# Altium PCB ATMEGA16单片机模块.PCBDOC
Units mm, origin at the board's own origin, x right, y up, seen from the top; angles counter-clockwise.
Board outline 152.4 x 101.6 mm, 2 copper layers (Top Layer, Bottom Layer); 9 components, 39 nets, 100 pads, 0 vias.
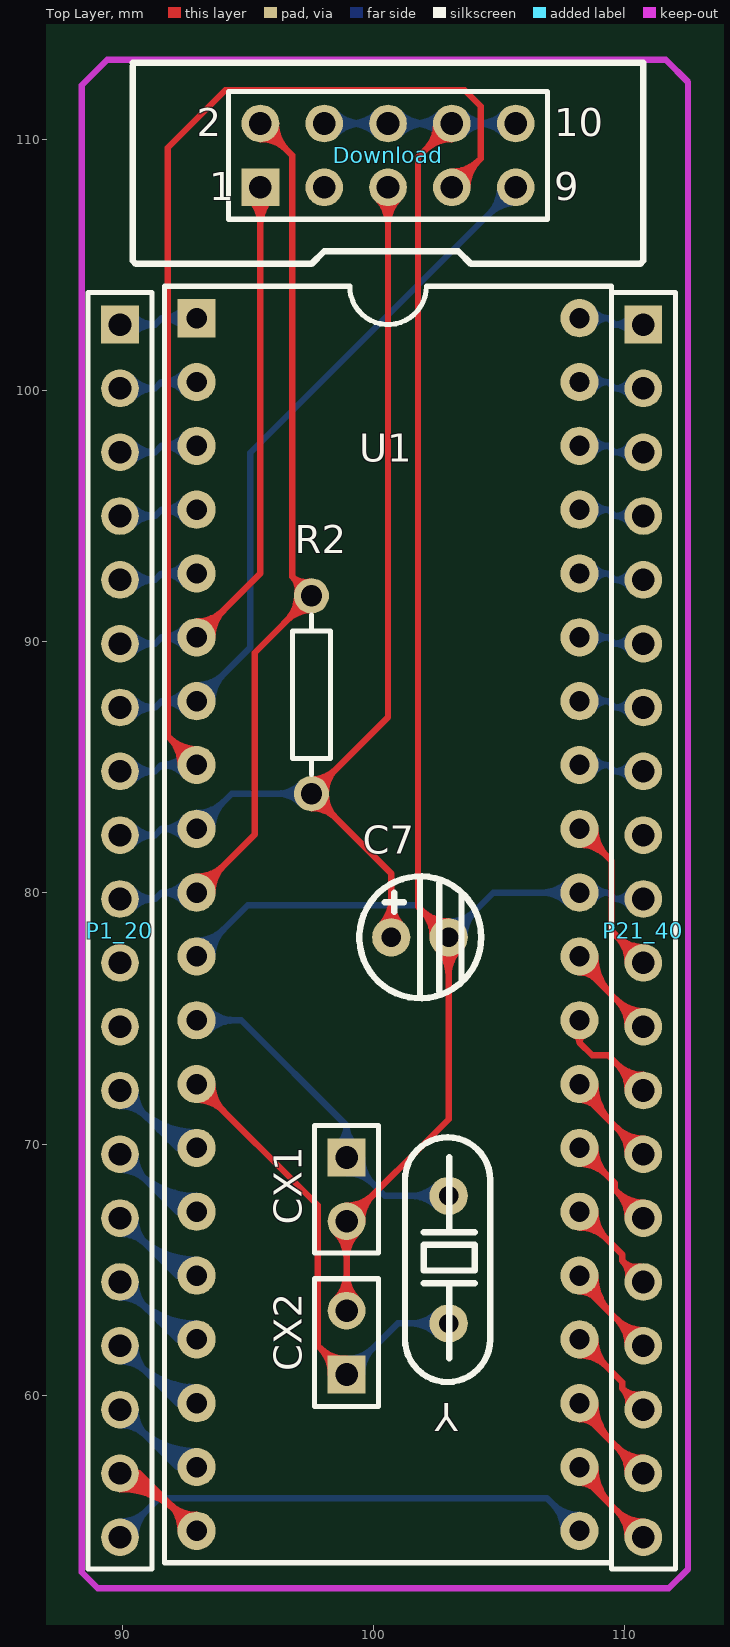
[diagram p0: Top Layer view]
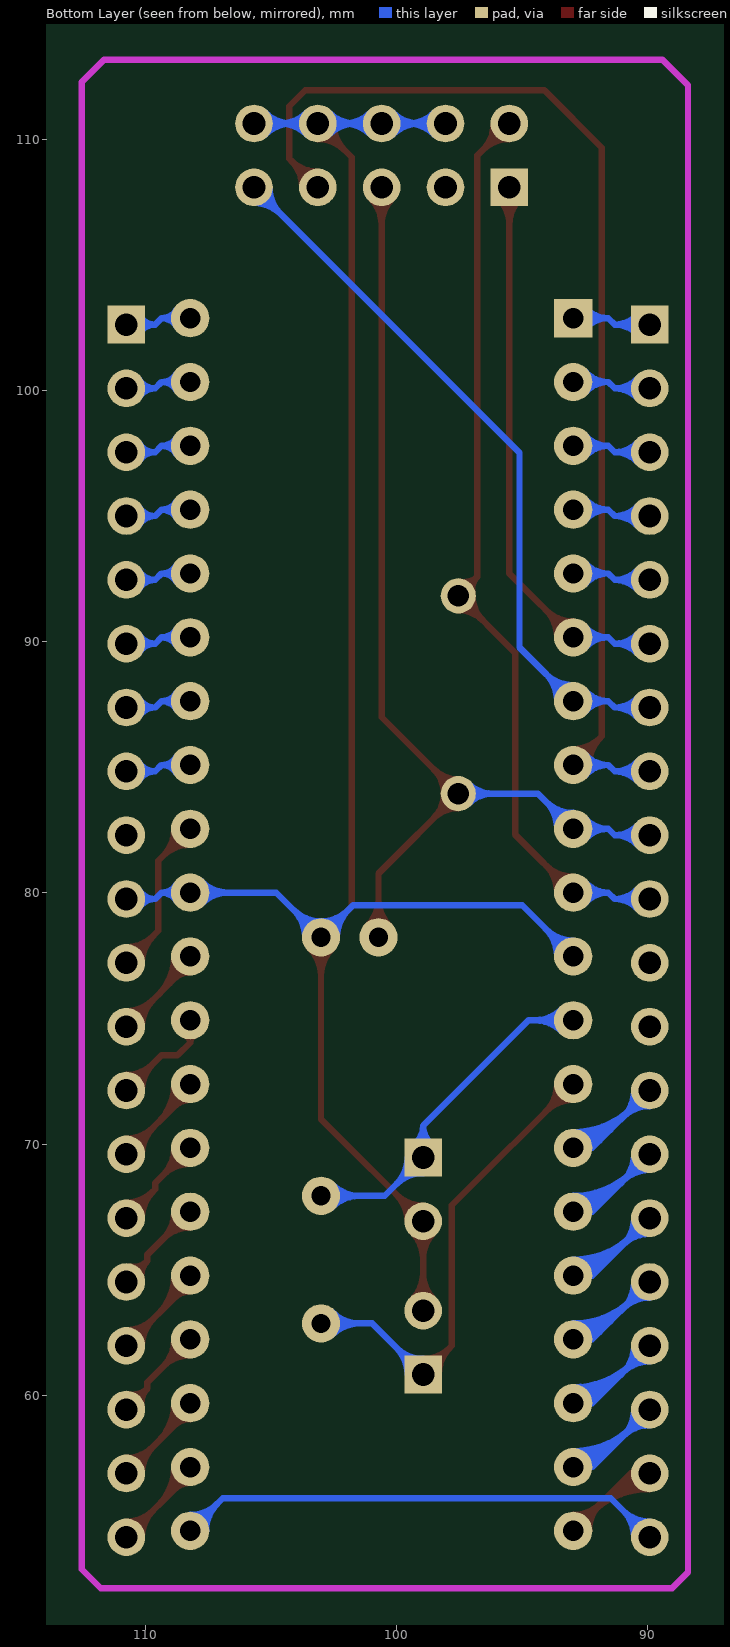
[diagram p1: Bottom Layer view, seen from below]

## Layer stack, top to bottom
Top Layer: signal copper 0.0356
Dielectric: dielectric 0.32, FR-4, Dk 4.8
Bottom Layer: signal copper 0.0356

## Board outline
25.4,25.4 177.8,25.4 177.8,127 25.4,127

## Design rules (kind name [scope] priority, off if disabled: settings)
Clearance [All] p1: gap=0.254
ComponentClearance [All] p1: gap=0.254 collisioncheckmode=3 verticalgap=0.254
PolygonConnect [All] p1: connectstyle=Relief reliefconductorwidth=0.254 reliefentries=4 polygonreliefangle="90 Angle"
RoutingVias [All] p1: holewidth=0.711 width=1.27 viastyle="Through Hole" minholewidth=0.711 minwidth=1.27 maxholewidth=0.711 maxwidth=1.27
SolderMaskExpansion [All] p1: expansion=0.102
TestPointUsage [All] p1: valid=0 allowmultiple=FALSE
Testpoint [All] p1: side=15 testpointundercomponent=TRUE minsize=1.016 maxsize=2.54 preferedsize=1.524 minholesize=0 maxholesize=1.016 preferedholesize=0.813 testpointgrid=0.025 style=1023 order=0123456789
Width [All] p1: maxlimit=0.254 minlimit=0.254 preferedwidth=0.254
17 further rules are at their usual default settings.

## Components (designator, comment, footprint, x,y, rotation, side; value= is the part's Value field where it differs from the comment)
C7 "10uf" C-DJ-4 103.124,75.692 r0 top
CX1 "30p" HDR1X2 98.933,69.469 r270 top
CX2 "30p" HDR1X2 98.933,60.833 r90 top
Download "Download" HDR-2x5 100.584,108.204 r0 top
P1_20 "PZ_20" HDR1X20 89.916,102.616 r270 top
P21_40 "PZ_20" HDR1X20 110.744,102.616 r270 top
R2 "10k" RSE 97.536,87.884 r90 top
U1 "ATmega16-16PI" 底座DIP-40/引脚15.24mm 100.584,78.74 r270 top
Y "Y" JZ_ZC 102.997,62.865 r270 top

## Footprints (in the part's own frame and the unit in brackets; to place one, negate y for a bottom-side part, rotate by r counter-clockwise, add the part's x,y. Pads: shape width x height; smd on the part's side, far side on the other; paste and mask are expansions set on the pad)
C-DJ-4 [mil] "电容4mm"
  round 60 hole 30: 1(-95,100) 2(-5,100)
  silkscreen extent -145,5 46,195
HDR1X2 [mm] "Connector; Header; 2 Position"
  rect 1.5x1.5 hole 0.9: 1(0,0)
  round 1.5 hole 0.9: 2(2.54,0)
  silkscreen extent -1.27,-1.27 3.81,1.27
HDR1X20 [mm] "Connector; Header; 20 Position"
  rect 1.5x1.5 hole 0.9: 1(0,0)
  round 1.5 hole 0.9: 2(2.54,0) 3(5.08,0) 4(7.62,0) 5(10.16,0) 6(12.7,0) 7(15.24,0) 8(17.78,0) 9(20.32,0) 10(22.86,0) 11(25.4,0) 12(27.94,0) 13(30.48,0) 14(33.02,0) 15(35.56,0) 16(38.1,0) 17(40.64,0) 18(43.18,0) 19(45.72,0) 20(48.26,0)
  silkscreen extent -1.27,-1.27 49.53,1.27
HDR-2x5 [mm] "下载口"
  rect 1.5x1.5 hole 0.9: 1(-5.08,-0.127)
  round 1.5 hole 0.9: 2(-5.08,2.413) 3(-2.54,-0.127) 4(-2.54,2.413) 5(0,-0.127) 6(0,2.413) 7(2.54,-0.127) 8(2.54,2.413) 9(5.08,-0.127) 10(5.08,2.413)
  silkscreen extent -10.16,-3.17 10.16,4.83
JZ_ZC [mil] "晶振"
  round 60 hole 30: 1(-200,0) 2(0,0)
  silkscreen extent -292,-68 92,65
RSE [mm] "直插电阻1/8W"
  round 1.4 hole 0.85: 1(-3.937,0) 2(3.937,0)
  silkscreen extent -3.17,-0.76 3.17,0.76
底座DIP-40/引脚15.24mm [mil] "引脚跨度 ：600 Mil ，主体外形 17.8×50.8mm（700×2000Mil）"
  rect 60x60 hole 32: 1(-950,-300)
  round 60 hole 32: 2(-850,-300) 3(-750,-300) 4(-650,-300) 5(-550,-300) 6(-450,-300) 7(-350,-300) 8(-250,-300) 9(-150,-300) 10(-50,-300) 11(50,-300) 12(150,-300) 13(250,-300) 14(350,-300) 15(450,-300) 16(550,-300) 17(650,-300) 18(750,-300) 19(850,-300) 20(950,-300) 21(950,300) 22(850,300) 23(750,300) 24(650,300) 25(550,300) 26(450,300) 27(350,300) 28(250,300) 29(150,300) 30(50,300) 31(-50,300) 32(-150,300) 33(-250,300) 34(-350,300) 35(-450,300) 36(-550,300) 37(-650,300) 38(-750,300) 39(-850,300) 40(-950,300)
  silkscreen extent -1000,-350 1000,350

## Part data
C7: library part "CAPACITOR POL", "Capacitor"
CX1 CX2: library part CAP, "Capacitor"
Download: library part "Header 5X2", "Header, 5-Pin, Dual row"
P1_20 P21_40: "排针——20"
R2: library part RES2
U1: library part ATmega16-P, "8 位微处理器/40引脚"
Y: library part CRYSTAL, "Crystal"

## Nets (pads, with @x,y where several pads share a name; then routed paths per layer and width w, separated by ;. In a path a pad name is that pad's centre, name@x,y a point inside that pad or via, vN(x,y) a via of type N, cw(c..) or ccw(c..) an arc to the next point about the centre after c; other vN are vias at no path point)
AREF: P21_40.11 U1.32 | length 14
  Top Layer w0.254: U1.32@108.204,81.915 cw(c108.204,80.382) 109.288,81.466 cw(c110.372,82.55) U1.32@108.839,82.55 ; U1.32@108.204,82.169 cw(c108.204,81.249) 108.854,81.9 cw(c109.505,82.55) U1.32@108.585,82.55 ; U1.32 109.474,81.28 109.474,78.486 P21_40.11 ; P21_40.11@110.121,77.216 ccw(c108.617,77.216) 109.68,78.28 ccw(c110.744,79.343) P21_40.11@110.744,77.839 ; P21_40.11@110.375,77.216 ccw(c109.484,77.216) 110.114,77.846 ccw(c110.744,78.476) P21_40.11@110.744,77.585
AVCC: P21_40.12 U1.30 | length 11.2
  Top Layer w0.254: U1.30@108.204,76.835 cw(c108.204,75.915) 108.854,76.566 ; U1.30 108.204,77.216 P21_40.12 ; U1.30@108.585,77.47 ccw(c110.118,77.47) 109.034,76.386 ; U1.30@108.839,77.47 ccw(c110.985,77.47) 109.468,75.952 ; P21_40.12@110.121,74.676 ccw(c108.617,74.676) 109.68,75.74 ccw(c110.744,76.803) P21_40.12@110.744,75.299 ; P21_40.12@110.375,74.676 ccw(c109.484,74.676) 110.114,75.306 ccw(c110.744,75.936) P21_40.12@110.744,75.045
GND: C7.2 CX1.2 CX2.2 Download.4 Download.6 Download.8 Download.10 P21_40.10 U1.11 U1.31 | length 141.2
  Top Layer w0.254: CX2.2@98.492,63.814 ccw(c97.429,64.877) 98.933,64.877 ccw(c100.437,64.877) CX2.2@99.374,63.814 ; CX1.2@98.492,66.488 cw(c97.429,65.425) 98.933,65.425 cw(c100.437,65.425) CX1.2@99.374,66.488 ; CX2.2@98.672,63.634 ccw(c98.042,64.264) 98.933,64.264 ccw(c99.824,64.264) CX2.2@99.194,63.634 ; CX1.2@98.672,66.668 cw(c98.042,66.038) 98.933,66.038 cw(c99.824,66.038) CX1.2@99.194,66.668 ; CX2.2 CX1.2 102.997,70.993 C7.2 101.778,79.451 101.778,109.271 Download.8 ; CX1.2@98.933,67.298 ccw(c98.933,68.189) 99.563,67.559 ccw(c100.193,66.929) CX1.2@99.302,66.929 ; CX1.2@98.933,67.552 ccw(c98.933,69.056) 99.997,67.993 ccw(c101.06,66.929) CX1.2@99.556,66.929 ; C7.2@102.362,78.232 ccw(c100.829,78.232) 101.913,79.316 ccw(c102.997,80.4) C7.2@102.997,78.867 ; Download.8@102.501,110.617 cw(c100.997,110.617) 102.06,109.553 cw(c103.124,108.49) Download.8@103.124,109.994 ; C7.2@102.548,77.783 cw(c101.464,76.699) 102.997,76.699 cw(c104.53,76.699) C7.2@103.446,77.783 ; C7.2@102.616,78.232 ccw(c101.696,78.232) 102.347,78.882 ccw(c102.997,79.533) C7.2@102.997,78.613 ; C7.2@102.728,77.963 cw(c102.077,77.312) 102.997,77.312 cw(c103.917,77.312) C7.2@103.266,77.963 ; Download.8@102.755,110.617 cw(c101.864,110.617) 102.494,109.987 cw(c103.124,109.357) Download.8@103.124,110.248
  Bottom Layer w0.254: U1.11 94.996,79.502 101.727,79.502 C7.2 104.775,80.01 U1.31 109.347,80.01 ; U1.11@92.964,77.851 ccw(c92.964,78.771) 93.614,78.12 ccw(c94.265,77.47) U1.11@93.345,77.47 ; U1.11@92.964,78.105 ccw(c92.964,79.638) 94.048,78.554 ccw(c95.132,77.47) U1.11@93.599,77.47 ; Download.4 Download.6 Download.8 Download.10 ; Download.4@98.305,110.356 cw(c98.935,109.726) 98.935,110.617 cw(c98.935,111.508) Download.4@98.305,110.878 ; Download.4@98.485,110.176 cw(c99.548,109.113) 99.548,110.617 cw(c99.548,112.121) Download.4@98.485,111.058 ; Download.6@100.143,110.176 ccw(c99.08,109.113) 99.08,110.617 ccw(c99.08,112.121) Download.6@100.143,111.058 ; Download.6@100.323,110.356 ccw(c99.693,109.726) 99.693,110.617 ccw(c99.693,111.508) Download.6@100.323,110.878 ; Download.6@100.845,110.356 cw(c101.475,109.726) 101.475,110.617 cw(c101.475,111.508) Download.6@100.845,110.878 ; Download.6@101.025,110.176 cw(c102.088,109.113) 102.088,110.617 cw(c102.088,112.121) Download.6@101.025,111.058 ; C7.2@102.362,78.232 ccw(c100.829,78.232) 101.913,79.316 ccw(c102.997,80.4) 102.997,78.867 ccw(c102.997,80.4) 104.081,79.316 ccw(c105.165,78.232) C7.2@103.632,78.232 ; C7.2@102.616,78.232 ccw(c101.696,78.232) 102.347,78.882 ccw(c102.997,79.533) 102.997,78.613 ccw(c102.997,79.533) 103.647,78.882 ccw(c104.298,78.232) C7.2@103.378,78.232 ; Download.8@102.683,110.176 ccw(c101.62,109.113) 101.62,110.617 ccw(c101.62,112.121) Download.8@102.683,111.058 ; Download.8@102.863,110.356 ccw(c102.233,109.726) 102.233,110.617 ccw(c102.233,111.508) Download.8@102.863,110.878 ; Download.8@103.385,110.356 cw(c104.015,109.726) 104.015,110.617 cw(c104.015,111.508) Download.8@103.385,110.878 ; Download.8@103.565,110.176 cw(c104.628,109.113) 104.628,110.617 cw(c104.628,112.121) Download.8@103.565,111.058 ; Download.10@105.223,110.176 ccw(c104.16,109.113) 104.16,110.617 ccw(c104.16,112.121) Download.10@105.223,111.058 ; Download.10@105.403,110.356 ccw(c104.773,109.726) 104.773,110.617 ccw(c104.773,111.508) Download.10@105.403,110.878 ; U1.31@107.755,79.561 ccw(c106.671,78.477) 106.671,80.01 ccw(c106.671,81.543) U1.31@107.755,80.459 ; U1.31@107.935,79.741 ccw(c107.284,79.09) 107.284,80.01 ccw(c107.284,80.93) U1.31@107.935,80.279 ; U1.31@108.743,79.675 cw(c109.347,79.299) 109.347,80.01 ; U1.31@108.743,80.345 ccw(c109.347,80.721) 109.347,80.01 ; P21_40.10@110.22,79.418 ccw(c109.601,79.019) 109.601,79.756 ; P21_40.10@110.22,80.094 cw(c109.601,80.493) 109.601,79.756 ; P21_40.10 109.601,79.756 ; 109.347,80.01 109.601,79.756
PA0: P21_40.1 U1.40 | length 5.6
  Bottom Layer w0.254: U1.40 109.347,102.87 ; U1.40@108.743,102.535 cw(c109.347,102.159) 109.347,102.87 ; U1.40@108.743,103.205 ccw(c109.347,103.581) 109.347,102.87 ; P21_40.1@110.22,102.278 ccw(c109.601,101.879) 109.601,102.616 ; P21_40.1@110.22,102.954 cw(c109.601,103.353) 109.601,102.616 ; P21_40.1 109.601,102.616 ; 109.347,102.87 109.601,102.616
PA1: P21_40.2 U1.39 | length 5.6
  Bottom Layer w0.254: U1.39 109.347,100.33 ; U1.39@108.743,99.995 cw(c109.347,99.619) 109.347,100.33 ; U1.39@108.743,100.665 ccw(c109.347,101.041) 109.347,100.33 ; P21_40.2@110.22,99.738 ccw(c109.601,99.339) 109.601,100.076 ; P21_40.2@110.22,100.414 cw(c109.601,100.813) 109.601,100.076 ; P21_40.2 109.601,100.076 ; 109.347,100.33 109.601,100.076
PA2: P21_40.3 U1.38 | length 5.6
  Bottom Layer w0.254: U1.38 109.347,97.79 ; U1.38@108.743,97.455 cw(c109.347,97.079) 109.347,97.79 ; U1.38@108.743,98.125 ccw(c109.347,98.501) 109.347,97.79 ; P21_40.3@110.22,97.198 ccw(c109.601,96.799) 109.601,97.536 ; P21_40.3@110.22,97.874 cw(c109.601,98.273) 109.601,97.536 ; P21_40.3 109.601,97.536 ; 109.347,97.79 109.601,97.536
PA3: P21_40.4 U1.37 | length 5.6
  Bottom Layer w0.254: U1.37 109.347,95.25 ; U1.37@108.743,94.915 cw(c109.347,94.539) 109.347,95.25 ; U1.37@108.743,95.585 ccw(c109.347,95.961) 109.347,95.25 ; P21_40.4@110.22,94.658 ccw(c109.601,94.259) 109.601,94.996 ; P21_40.4@110.22,95.334 cw(c109.601,95.733) 109.601,94.996 ; P21_40.4 109.601,94.996 ; 109.347,95.25 109.601,94.996
PA4: P21_40.5 U1.36 | length 5.6
  Bottom Layer w0.254: U1.36 109.347,92.71 ; U1.36@108.743,92.375 cw(c109.347,91.999) 109.347,92.71 ; U1.36@108.743,93.045 ccw(c109.347,93.421) 109.347,92.71 ; P21_40.5@110.22,92.118 ccw(c109.601,91.719) 109.601,92.456 ; P21_40.5@110.22,92.794 cw(c109.601,93.193) 109.601,92.456 ; P21_40.5 109.601,92.456 ; 109.347,92.71 109.601,92.456
PA5: P21_40.6 U1.35 | length 5.6
  Bottom Layer w0.254: U1.35 109.347,90.17 ; U1.35@108.743,89.835 cw(c109.347,89.459) 109.347,90.17 ; U1.35@108.743,90.505 ccw(c109.347,90.881) 109.347,90.17 ; P21_40.6@110.22,89.578 ccw(c109.601,89.179) 109.601,89.916 ; P21_40.6@110.22,90.254 cw(c109.601,90.653) 109.601,89.916 ; P21_40.6 109.601,89.916 ; 109.347,90.17 109.601,89.916
PA6: P21_40.7 U1.34 | length 5.6
  Bottom Layer w0.254: U1.34 109.347,87.63 ; U1.34@108.743,87.295 cw(c109.347,86.919) 109.347,87.63 ; U1.34@108.743,87.965 ccw(c109.347,88.341) 109.347,87.63 ; P21_40.7@110.22,87.038 ccw(c109.601,86.639) 109.601,87.376 ; P21_40.7@110.22,87.714 cw(c109.601,88.113) 109.601,87.376 ; P21_40.7 109.601,87.376 ; 109.347,87.63 109.601,87.376
PA7: P21_40.8 U1.33 | length 5.6
  Bottom Layer w0.254: U1.33 109.347,85.09 ; U1.33@108.743,84.755 cw(c109.347,84.379) 109.347,85.09 ; U1.33@108.743,85.425 ccw(c109.347,85.801) 109.347,85.09 ; P21_40.8@110.22,84.498 ccw(c109.601,84.099) 109.601,84.836 ; P21_40.8@110.22,85.174 cw(c109.601,85.573) 109.601,84.836 ; P21_40.8 109.601,84.836 ; 109.347,85.09 109.601,84.836
PB0: P1_20.1 U1.1 | length 9.8
  Bottom Layer w0.254: P1_20.1 91.313,102.616 ; P1_20.1@90.191,102.369 cw(c90.743,101.873) 90.743,102.616 cw(c90.743,103.359) P1_20.1@90.191,102.863 ; P1_20.1@90.38,102.2 cw(c91.313,101.361) 91.313,102.616 ; P1_20.1@90.38,103.032 ccw(c91.313,103.871) 91.313,102.616 ; U1.1@92.486,102.452 ccw(c91.567,101.651) 91.567,102.87 ; U1.1@92.486,103.288 cw(c91.567,104.089) 91.567,102.87 ; U1.1@92.677,102.619 ccw(c92.126,102.139) 92.126,102.87 ccw(c92.126,103.601) U1.1@92.677,103.121 ; U1.1 91.567,102.87 ; 91.313,102.616 91.567,102.87
PB1: P1_20.2 U1.2 | length 9.8
  Bottom Layer w0.254: P1_20.2 91.313,100.076 ; P1_20.2@90.191,99.829 cw(c90.743,99.333) 90.743,100.076 cw(c90.743,100.819) P1_20.2@90.191,100.323 ; P1_20.2@90.38,99.66 cw(c91.313,98.821) 91.313,100.076 ; P1_20.2@90.38,100.492 ccw(c91.313,101.331) 91.313,100.076 ; U1.2@92.486,99.912 ccw(c91.567,99.111) 91.567,100.33 ; U1.2@92.486,100.748 cw(c91.567,101.549) 91.567,100.33 ; U1.2@92.677,100.079 ccw(c92.126,99.599) 92.126,100.33 ccw(c92.126,101.061) U1.2@92.677,100.581 ; U1.2 91.567,100.33 ; 91.313,100.076 91.567,100.33
PB2: P1_20.3 U1.3 | length 9.8
  Bottom Layer w0.254: P1_20.3 91.313,97.536 ; P1_20.3@90.191,97.289 cw(c90.743,96.793) 90.743,97.536 cw(c90.743,98.279) P1_20.3@90.191,97.783 ; P1_20.3@90.38,97.12 cw(c91.313,96.281) 91.313,97.536 ; P1_20.3@90.38,97.952 ccw(c91.313,98.791) 91.313,97.536 ; U1.3@92.486,97.372 ccw(c91.567,96.571) 91.567,97.79 ; U1.3@92.486,98.208 cw(c91.567,99.009) 91.567,97.79 ; U1.3@92.677,97.539 ccw(c92.126,97.059) 92.126,97.79 ccw(c92.126,98.521) U1.3@92.677,98.041 ; U1.3 91.567,97.79 ; 91.313,97.536 91.567,97.79
PB3: P1_20.4 U1.4 | length 9.8
  Bottom Layer w0.254: P1_20.4 91.313,94.996 ; P1_20.4@90.191,94.749 cw(c90.743,94.253) 90.743,94.996 cw(c90.743,95.739) P1_20.4@90.191,95.243 ; P1_20.4@90.38,94.58 cw(c91.313,93.741) 91.313,94.996 ; P1_20.4@90.38,95.412 ccw(c91.313,96.251) 91.313,94.996 ; U1.4@92.486,94.832 ccw(c91.567,94.031) 91.567,95.25 ; U1.4@92.486,95.668 cw(c91.567,96.469) 91.567,95.25 ; U1.4@92.677,94.999 ccw(c92.126,94.519) 92.126,95.25 ccw(c92.126,95.981) U1.4@92.677,95.501 ; U1.4 91.567,95.25 ; 91.313,94.996 91.567,95.25
PB4: P1_20.5 U1.5 | length 9.8
  Bottom Layer w0.254: P1_20.5 91.313,92.456 ; P1_20.5@90.191,92.209 cw(c90.743,91.713) 90.743,92.456 cw(c90.743,93.199) P1_20.5@90.191,92.703 ; P1_20.5@90.38,92.04 cw(c91.313,91.201) 91.313,92.456 ; P1_20.5@90.38,92.872 ccw(c91.313,93.711) 91.313,92.456 ; U1.5@92.486,92.292 ccw(c91.567,91.491) 91.567,92.71 ; U1.5@92.486,93.128 cw(c91.567,93.929) 91.567,92.71 ; U1.5@92.677,92.459 ccw(c92.126,91.979) 92.126,92.71 ccw(c92.126,93.441) U1.5@92.677,92.961 ; U1.5 91.567,92.71 ; 91.313,92.456 91.567,92.71
PB5: Download.1 P1_20.6 U1.6 | length 36.4
  Top Layer w0.254: U1.6 95.504,92.71 Download.1 ; U1.6@92.964,90.551 ccw(c92.964,91.471) 93.614,90.82 ccw(c94.265,90.17) U1.6@93.345,90.17 ; U1.6@92.964,90.805 ccw(c92.964,92.338) 94.048,91.254 ccw(c95.132,90.17) U1.6@93.599,90.17 ; Download.1@95.063,107.636 cw(c94,106.573) 95.504,106.573 cw(c97.008,106.573) Download.1@95.945,107.636 ; Download.1@95.243,107.816 cw(c94.613,107.186) 95.504,107.186 cw(c96.395,107.186) Download.1@95.765,107.816
  Bottom Layer w0.254: P1_20.6 91.313,89.916 ; P1_20.6@90.191,89.669 cw(c90.743,89.173) 90.743,89.916 cw(c90.743,90.659) P1_20.6@90.191,90.163 ; P1_20.6@90.38,89.5 cw(c91.313,88.661) 91.313,89.916 ; P1_20.6@90.38,90.332 ccw(c91.313,91.171) 91.313,89.916 ; U1.6@92.486,89.752 ccw(c91.567,88.951) 91.567,90.17 ; U1.6@92.486,90.588 cw(c91.567,91.389) 91.567,90.17 ; U1.6@92.677,89.919 ccw(c92.126,89.439) 92.126,90.17 ccw(c92.126,90.901) U1.6@92.677,90.421 ; U1.6 91.567,90.17 ; 91.313,89.916 91.567,90.17
PB6: Download.9 P1_20.7 U1.7 | length 43.2
  Bottom Layer w0.254: P1_20.7 91.313,87.376 ; P1_20.7@90.191,87.129 cw(c90.743,86.633) 90.743,87.376 cw(c90.743,88.119) P1_20.7@90.191,87.623 ; P1_20.7@90.38,86.96 cw(c91.313,86.121) 91.313,87.376 ; P1_20.7@90.38,87.792 ccw(c91.313,88.631) 91.313,87.376 ; U1.7@92.486,87.212 ccw(c91.567,86.411) 91.567,87.63 ; U1.7@92.486,88.048 cw(c91.567,88.849) 91.567,87.63 ; U1.7@92.677,87.379 ccw(c92.126,86.899) 92.126,87.63 ccw(c92.126,88.361) U1.7@92.677,87.881 ; U1.7@92.964,88.011 ccw(c92.964,88.931) 93.614,88.28 ccw(c94.265,87.63) U1.7@93.345,87.63 ; U1.7@92.964,88.265 ccw(c92.964,89.798) 94.048,88.714 ccw(c95.132,87.63) U1.7@93.599,87.63 ; Download.9@105.041,108.077 cw(c103.537,108.077) 104.6,107.013 cw(c105.664,105.95) Download.9@105.664,107.454 ; Download.9@105.295,108.077 cw(c104.404,108.077) 105.034,107.447 cw(c105.664,106.817) Download.9@105.664,107.708 ; Download.9 95.098,97.511 95.098,89.764 U1.7 91.567,87.63 ; 91.313,87.376 91.567,87.63
PB7: Download.7 P1_20.8 U1.8 | length 59.8
  Top Layer w0.254: U1.8@92.329,85.09 ccw(c90.796,85.09) 91.88,86.174 ccw(c92.964,87.258) U1.8@92.964,85.725 ; U1.8@92.583,85.09 ccw(c91.663,85.09) 92.314,85.74 ccw(c92.964,86.391) U1.8@92.964,85.471 ; U1.8 91.821,86.233 91.821,109.652 94.107,111.938 103.632,111.938 104.267,111.303 104.267,109.22 Download.7 ; Download.7@103.124,108.446 ccw(c103.124,109.337) 103.754,108.707 ccw(c104.384,108.077) Download.7@103.493,108.077 ; Download.7@103.124,108.7 ccw(c103.124,110.204) 104.188,109.141 ccw(c105.251,108.077) Download.7@103.747,108.077
  Bottom Layer w0.254: P1_20.8 91.313,84.836 ; P1_20.8@90.191,84.589 cw(c90.743,84.093) 90.743,84.836 cw(c90.743,85.579) P1_20.8@90.191,85.083 ; P1_20.8@90.38,84.42 cw(c91.313,83.581) 91.313,84.836 ; P1_20.8@90.38,85.252 ccw(c91.313,86.091) 91.313,84.836 ; U1.8@92.486,84.672 ccw(c91.567,83.871) 91.567,85.09 ; U1.8@92.486,85.508 cw(c91.567,86.309) 91.567,85.09 ; U1.8@92.677,84.839 ccw(c92.126,84.359) 92.126,85.09 ccw(c92.126,85.821) U1.8@92.677,85.341 ; U1.8 91.567,85.09 ; 91.313,84.836 91.567,85.09
PC0: P21_40.20 U1.22 | length 11.2
  Top Layer w0.254: U1.22@108.204,56.515 cw(c108.204,55.595) 108.854,56.246 ; U1.22 108.204,56.896 P21_40.20 ; U1.22@108.585,57.15 ccw(c110.118,57.15) 109.034,56.066 ; U1.22@108.839,57.15 ccw(c110.985,57.15) 109.468,55.632 ; P21_40.20@110.121,54.356 ccw(c108.617,54.356) 109.68,55.42 ccw(c110.744,56.483) P21_40.20@110.744,54.979 ; P21_40.20@110.375,54.356 ccw(c109.484,54.356) 110.114,54.986 ccw(c110.744,55.616) P21_40.20@110.744,54.725
PC1: P21_40.19 U1.23 | length 11.2
  Top Layer w0.254: U1.23@108.204,59.055 cw(c108.204,58.135) 108.854,58.786 ; U1.23 108.204,59.436 P21_40.19 ; U1.23@108.585,59.69 ccw(c110.118,59.69) 109.034,58.606 ; U1.23@108.839,59.69 ccw(c110.985,59.69) 109.468,58.172 ; P21_40.19@110.121,56.896 ccw(c108.617,56.896) 109.68,57.96 ccw(c110.744,59.023) P21_40.19@110.744,57.519 ; P21_40.19@110.375,56.896 ccw(c109.484,56.896) 110.114,57.526 ccw(c110.744,58.156) P21_40.19@110.744,57.265
PC2: P21_40.18 U1.24 | length 9.3
  Top Layer w0.254: U1.24@108.204,61.595 cw(c108.204,60.062) 109.288,61.146 cw(c110.372,62.23) U1.24@108.839,62.23 ; U1.24@108.204,61.849 cw(c108.204,60.929) 108.854,61.58 cw(c109.505,62.23) U1.24@108.585,62.23 ; U1.24 109.906,60.528 109.906,60.274 ; P21_40.18@110.131,59.549 ccw(c109.329,59.697) 109.906,60.274 ; P21_40.18@110.631,60.049 cw(c110.483,60.851) 109.906,60.274 ; P21_40.18 109.906,60.274
PC3: P21_40.17 U1.25 | length 11.2
  Top Layer w0.254: U1.25@108.204,64.135 cw(c108.204,63.215) 108.854,63.866 ; U1.25 108.204,64.516 P21_40.17 ; U1.25@108.585,64.77 ccw(c110.118,64.77) 109.034,63.686 ; U1.25@108.839,64.77 ccw(c110.985,64.77) 109.468,63.252 ; P21_40.17@110.121,61.976 ccw(c108.617,61.976) 109.68,63.04 ccw(c110.744,64.103) P21_40.17@110.744,62.599 ; P21_40.17@110.375,61.976 ccw(c109.484,61.976) 110.114,62.606 ccw(c110.744,63.236) P21_40.17@110.744,62.345
PC4: P21_40.16 U1.26 | length 9.3
  Top Layer w0.254: U1.26@108.204,66.675 cw(c108.204,65.142) 109.288,66.226 cw(c110.372,67.31) U1.26@108.839,67.31 ; U1.26@108.204,66.929 cw(c108.204,66.009) 108.854,66.66 cw(c109.505,67.31) U1.26@108.585,67.31 ; U1.26 109.906,65.608 109.906,65.354 ; P21_40.16@110.131,64.629 ccw(c109.329,64.777) 109.906,65.354 ; P21_40.16@110.631,65.129 cw(c110.483,65.931) 109.906,65.354 ; P21_40.16 109.906,65.354
PC5: P21_40.15 U1.27 | length 11.5
  Top Layer w0.254: U1.27@108.204,69.215 cw(c108.204,67.682) 109.288,68.766 cw(c110.372,69.85) U1.27@108.839,69.85 ; U1.27@108.204,69.469 cw(c108.204,68.549) 108.854,69.2 cw(c109.505,69.85) U1.27@108.585,69.85 ; U1.27 109.601,68.453 109.601,68.199 P21_40.15 ; P21_40.15@110.121,67.056 ccw(c108.617,67.056) 109.68,68.12 ccw(c110.744,69.183) P21_40.15@110.744,67.679 ; P21_40.15@110.375,67.056 ccw(c109.484,67.056) 110.114,67.686 ccw(c110.744,68.316) P21_40.15@110.744,67.425
PC6: P21_40.14 U1.28 | length 11.2
  Top Layer w0.254: U1.28@108.204,71.755 cw(c108.204,70.835) 108.854,71.486 ; U1.28 108.204,72.136 P21_40.14 ; U1.28@108.585,72.39 ccw(c110.118,72.39) 109.034,71.306 ; U1.28@108.839,72.39 ccw(c110.985,72.39) 109.468,70.872 ; P21_40.14@110.121,69.596 ccw(c108.617,69.596) 109.68,70.66 ccw(c110.744,71.723) P21_40.14@110.744,70.219 ; P21_40.14@110.375,69.596 ccw(c109.484,69.596) 110.114,70.226 ccw(c110.744,70.856) P21_40.14@110.744,69.965
PC7: P21_40.13 U1.29 | length 9.5
  Top Layer w0.254: U1.29 108.204,74.041 ; P21_40.13@110.121,72.136 ccw(c108.617,72.136) 109.68,73.2 ccw(c110.744,74.263) P21_40.13@110.744,72.759 ; P21_40.13@110.375,72.136 ccw(c109.484,72.136) 110.114,72.766 ccw(c110.744,73.396) P21_40.13@110.744,72.505 ; P21_40.13 109.347,73.533 108.712,73.533 108.204,74.041 ; 108.204,74.041 ccw(c107.899,74.041) 107.998,74.329 cw(c107.899,74.041) 108.204,74.041 ; 108.204,74.041 cw(c108.509,74.041) 108.41,74.329 ccw(c108.509,74.041) 108.204,74.041
PD0: P1_20.13 U1.14 | length 15.5
  Bottom Layer w0.254: P1_20.13@89.916,71.513 cw(c89.916,70.009) 90.98,71.072 cw(c92.043,72.136) P1_20.13@90.539,72.136 ; P1_20.13@89.916,71.767 cw(c89.916,70.876) 90.546,71.506 cw(c91.176,72.136) P1_20.13@90.285,72.136 ; P1_20.13 92.202,69.85 U1.14 ; 90.579,71.473 ccw(c92.964,73.858) U1.14@92.964,70.485 ; 91.013,71.039 ccw(c92.964,72.99) U1.14@92.964,70.231 ; 91.446,70.606 ccw(c92.964,72.123) U1.14@92.964,69.977 ; 91.88,70.172 ccw(c92.964,71.256) U1.14@92.964,69.723
PD1: P1_20.14 U1.15 | length 15.5
  Bottom Layer w0.254: P1_20.14@89.916,68.973 cw(c89.916,67.469) 90.98,68.532 cw(c92.043,69.596) P1_20.14@90.539,69.596 ; P1_20.14@89.916,69.227 cw(c89.916,68.336) 90.546,68.966 cw(c91.176,69.596) P1_20.14@90.285,69.596 ; P1_20.14 92.202,67.31 U1.15 ; 90.579,68.933 ccw(c92.964,71.318) U1.15@92.964,67.945 ; 91.013,68.499 ccw(c92.964,70.45) U1.15@92.964,67.691 ; 91.446,68.066 ccw(c92.964,69.583) U1.15@92.964,67.437 ; 91.88,67.632 ccw(c92.964,68.716) U1.15@92.964,67.183
PD2: P1_20.15 U1.16 | length 15.5
  Bottom Layer w0.254: P1_20.15@89.916,66.433 cw(c89.916,64.929) 90.98,65.992 cw(c92.043,67.056) P1_20.15@90.539,67.056 ; P1_20.15@89.916,66.687 cw(c89.916,65.796) 90.546,66.426 cw(c91.176,67.056) P1_20.15@90.285,67.056 ; P1_20.15 92.202,64.77 U1.16 ; 90.579,66.393 ccw(c92.964,68.778) U1.16@92.964,65.405 ; 91.013,65.959 ccw(c92.964,67.91) U1.16@92.964,65.151 ; 91.446,65.526 ccw(c92.964,67.043) U1.16@92.964,64.897 ; 91.88,65.092 ccw(c92.964,66.176) U1.16@92.964,64.643
PD3: P1_20.16 U1.17 | length 15.5
  Bottom Layer w0.254: P1_20.16@89.916,63.893 cw(c89.916,62.389) 90.98,63.452 cw(c92.043,64.516) P1_20.16@90.539,64.516 ; P1_20.16@89.916,64.147 cw(c89.916,63.256) 90.546,63.886 cw(c91.176,64.516) P1_20.16@90.285,64.516 ; P1_20.16 92.202,62.23 U1.17 ; 90.579,63.853 ccw(c92.964,66.238) U1.17@92.964,62.865 ; 91.013,63.419 ccw(c92.964,65.37) U1.17@92.964,62.611 ; 91.446,62.986 ccw(c92.964,64.503) U1.17@92.964,62.357 ; 91.88,62.552 ccw(c92.964,63.636) U1.17@92.964,62.103
PD4: P1_20.17 U1.18 | length 15.5
  Bottom Layer w0.254: P1_20.17@89.916,61.353 cw(c89.916,59.849) 90.98,60.912 cw(c92.043,61.976) P1_20.17@90.539,61.976 ; P1_20.17@89.916,61.607 cw(c89.916,60.716) 90.546,61.346 cw(c91.176,61.976) P1_20.17@90.285,61.976 ; P1_20.17 92.202,59.69 U1.18 ; 90.579,61.313 ccw(c92.964,63.698) U1.18@92.964,60.325 ; 91.013,60.879 ccw(c92.964,62.83) U1.18@92.964,60.071 ; 91.446,60.446 ccw(c92.964,61.963) U1.18@92.964,59.817 ; 91.88,60.012 ccw(c92.964,61.096) U1.18@92.964,59.563
PD5: P1_20.18 U1.19 | length 15.5
  Bottom Layer w0.254: P1_20.18@89.916,58.813 cw(c89.916,57.309) 90.98,58.372 cw(c92.043,59.436) P1_20.18@90.539,59.436 ; P1_20.18@89.916,59.067 cw(c89.916,58.176) 90.546,58.806 cw(c91.176,59.436) P1_20.18@90.285,59.436 ; P1_20.18 92.202,57.15 U1.19 ; 90.579,58.773 ccw(c92.964,61.158) U1.19@92.964,57.785 ; 91.013,58.339 ccw(c92.964,60.29) U1.19@92.964,57.531 ; 91.446,57.906 ccw(c92.964,59.423) U1.19@92.964,57.277 ; 91.88,57.472 ccw(c92.964,58.556) U1.19@92.964,57.023
PD6: P1_20.19 U1.20 | length 15.9
  Top Layer w0.254: P1_20.19@89.916,56.273 cw(c89.916,52.929) 92.28,55.294 ; P1_20.19@89.916,56.527 cw(c89.916,53.797) 91.847,55.727 ; P1_20.19@89.916,56.781 cw(c89.916,54.664) 91.413,56.161 ; P1_20.19 90.678,56.896 ; P1_20.19@89.916,57.035 cw(c89.916,55.531) 90.98,56.594 ; P1_20.19@90.527,56.772 cw(c90.678,56.742) 90.678,56.896 ; P1_20.19@90.527,57.02 ccw(c90.678,57.05) 90.678,56.896 ; U1.20@92.329,54.61 ccw(c90.796,54.61) 91.88,55.694 ccw(c92.964,56.778) U1.20@92.964,55.245 ; U1.20@92.583,54.61 ccw(c91.663,54.61) 92.314,55.26 ccw(c92.964,55.911) U1.20@92.964,54.991 ; U1.20 90.678,56.896
PD7: P1_20.20 U1.21 | length 27.1
  Bottom Layer w0.254: P1_20.20 91.465,55.905 106.909,55.905 U1.21 ; P1_20.20@89.916,54.725 ccw(c89.916,55.616) 90.546,54.986 ccw(c91.176,54.356) P1_20.20@90.285,54.356 ; P1_20.20@89.916,54.979 ccw(c89.916,56.483) 90.98,55.42 ccw(c92.043,54.356) P1_20.20@90.539,54.356 ; U1.21@107.569,54.61 ccw(c106.036,54.61) 107.12,55.694 ccw(c108.204,56.778) U1.21@108.204,55.245 ; U1.21@107.823,54.61 ccw(c106.903,54.61) 107.554,55.26 ccw(c108.204,55.911) U1.21@108.204,54.991
RESET: C7.1 Download.5 P1_20.9 R2.1 U1.9 | length 69
  Top Layer w0.254: R2.1@97.536,83.374 cw(c97.536,81.991) 98.514,82.969 cw(c99.492,83.947) 98.109,83.947 cw(c99.492,83.947) 98.514,84.925 cw(c97.536,85.903) R2.1@97.536,84.52 ; R2.1@97.536,83.628 cw(c97.536,82.858) 98.081,83.402 cw(c98.625,83.947) 97.855,83.947 cw(c98.625,83.947) 98.081,84.492 cw(c97.536,85.036) R2.1@97.536,84.266 ; Download.5@100.143,107.636 cw(c99.08,106.573) 100.584,106.573 cw(c102.088,106.573) Download.5@101.025,107.636 ; C7.1@100.262,78.681 ccw(c99.178,79.765) 100.711,79.765 ccw(c102.244,79.765) C7.1@101.16,78.681 ; Download.5@100.323,107.816 cw(c99.693,107.186) 100.584,107.186 cw(c101.475,107.186) Download.5@100.845,107.816 ; C7.1@100.442,78.501 ccw(c99.791,79.152) 100.711,79.152 ccw(c101.631,79.152) C7.1@100.98,78.501 ; Download.5 100.584,86.995 R2.1 100.711,80.772 C7.1
  Bottom Layer w0.254: P1_20.9 91.313,82.296 ; P1_20.9@90.191,82.049 cw(c90.743,81.553) 90.743,82.296 cw(c90.743,83.039) P1_20.9@90.191,82.543 ; P1_20.9@90.38,81.88 cw(c91.313,81.041) 91.313,82.296 ; P1_20.9@90.38,82.712 ccw(c91.313,83.551) 91.313,82.296 ; U1.9@92.486,82.132 ccw(c91.567,81.331) 91.567,82.55 ; U1.9@92.486,82.968 cw(c91.567,83.769) 91.567,82.55 ; U1.9@92.677,82.299 ccw(c92.126,81.819) 92.126,82.55 ccw(c92.126,83.281) U1.9@92.677,82.801 ; U1.9@92.964,82.931 ccw(c92.964,83.851) 93.614,83.2 ccw(c94.265,82.55) U1.9@93.345,82.55 ; U1.9@92.964,83.185 ccw(c92.964,84.718) 94.048,83.634 ccw(c95.132,82.55) U1.9@93.599,82.55 ; R2.1@97.131,83.542 ccw(c96.153,82.564) 96.153,83.947 ccw(c96.153,85.33) R2.1@97.131,84.352 ; R2.1@97.31,83.721 ccw(c96.766,83.177) 96.766,83.947 ccw(c96.766,84.717) R2.1@97.31,84.173 ; R2.1 94.361,83.947 U1.9 91.567,82.55 ; 91.313,82.296 91.567,82.55
VCC: Download.2 P1_20.10 R2.2 U1.10 | length 55.6
  Top Layer w0.254: U1.10 95.275,82.321 95.275,89.56 R2.2 96.774,92.583 ; U1.10@92.964,80.391 ccw(c92.964,81.311) 93.614,80.66 ccw(c94.265,80.01) U1.10@93.345,80.01 ; U1.10@92.964,80.645 ccw(c92.964,82.178) 94.048,81.094 ccw(c95.132,80.01) U1.10@93.599,80.01 ; Download.2@95.504,109.994 cw(c95.504,108.49) 96.568,109.553 cw(c97.631,110.617) Download.2@96.127,110.617 ; Download.2@95.504,110.248 cw(c95.504,109.357) 96.134,109.987 cw(c96.764,110.617) Download.2@95.873,110.617 ; Download.2 96.774,109.347 96.774,92.583 ; R2.2@96.963,91.821 cw(c95.58,91.821) 96.558,90.843 cw(c97.536,89.865) R2.2@97.536,91.248 ; R2.2@96.974,91.93 ccw(c96.26,92.069) 96.774,92.583 ; R2.2@97.217,91.821 cw(c96.447,91.821) 96.991,91.276 cw(c97.536,90.732) R2.2@97.536,91.502 ; R2.2@97.427,92.383 cw(c97.288,93.097) 96.774,92.583
  Bottom Layer w0.254: P1_20.10 91.313,79.756 ; P1_20.10@90.191,79.509 cw(c90.743,79.013) 90.743,79.756 cw(c90.743,80.499) P1_20.10@90.191,80.003 ; P1_20.10@90.38,79.34 cw(c91.313,78.501) 91.313,79.756 ; P1_20.10@90.38,80.172 ccw(c91.313,81.011) 91.313,79.756 ; U1.10@92.486,79.592 ccw(c91.567,78.791) 91.567,80.01 ; U1.10@92.486,80.428 cw(c91.567,81.229) 91.567,80.01 ; U1.10@92.677,79.759 ccw(c92.126,79.279) 92.126,80.01 ccw(c92.126,80.741) U1.10@92.677,80.261 ; U1.10 91.567,80.01 ; 91.313,79.756 91.567,80.01
XTAL1: CX2.1 U1.13 Y.2 | length 34.2
  Top Layer w0.254: U1.13@92.964,71.755 cw(c92.964,70.222) 94.048,71.306 cw(c95.132,72.39) U1.13@93.599,72.39 ; U1.13@92.964,72.009 cw(c92.964,71.089) 93.614,71.74 cw(c94.265,72.39) U1.13@93.345,72.39 ; U1.13 97.79,67.564 97.79,61.976 CX2.1 ; CX2.1@98.31,60.833 ccw(c96.806,60.833) 97.869,61.897 ccw(c98.933,62.96) CX2.1@98.933,61.456 ; CX2.1@98.564,60.833 ccw(c97.673,60.833) 98.303,61.463 ccw(c98.933,62.093) CX2.1@98.933,61.202
  Bottom Layer w0.254: CX2.1 100.965,62.865 Y.2 ; CX2.1@98.933,61.202 ccw(c98.933,62.093) 99.563,61.463 ccw(c100.193,60.833) CX2.1@99.302,60.833 ; CX2.1@98.933,61.456 ccw(c98.933,62.96) 99.997,61.897 ccw(c101.06,60.833) CX2.1@99.556,60.833 ; Y.2@102.548,62.416 ccw(c101.464,61.332) 101.464,62.865 ccw(c101.464,64.398) Y.2@102.548,63.314 ; Y.2@102.728,62.596 ccw(c102.077,61.945) 102.077,62.865 ccw(c102.077,63.785) Y.2@102.728,63.134
XTAL2: CX1.1 U1.12 Y.1 | length 28
  Bottom Layer w0.254: U1.12 94.742,74.93 98.933,70.739 ; U1.12@93.233,74.661 cw(c93.884,74.01) 93.884,74.93 cw(c93.884,75.85) U1.12@93.233,75.199 ; U1.12@93.413,74.481 cw(c94.497,73.397) 94.497,74.93 cw(c94.497,76.463) U1.12@93.413,75.379 ; CX1.1@98.552,69.962 ccw(c97.95,70.739) 98.933,70.739 ; CX1.1@98.707,69.761 ccw(c98.351,70.221) 98.933,70.221 ccw(c99.515,70.221) CX1.1@99.159,69.761 ; CX1.1@98.933,68.846 cw(c98.933,67.342) 99.997,68.405 cw(c101.06,69.469) CX1.1@99.556,69.469 ; CX1.1@98.933,69.1 cw(c98.933,68.209) 99.563,68.839 cw(c100.193,69.469) CX1.1@99.302,69.469 ; CX1.1@99.314,69.962 cw(c99.916,70.739) 98.933,70.739 ; Y.1@102.548,67.496 ccw(c101.464,66.412) 101.464,67.945 ccw(c101.464,69.478) Y.1@102.548,68.394 ; Y.1@102.728,67.676 ccw(c102.077,67.025) 102.077,67.945 ccw(c102.077,68.865) Y.1@102.728,68.214 ; Y.1 100.457,67.945 CX1.1 98.933,70.739
pads on no net: Download.3 P1_20.11 P1_20.12 P21_40.9

## Keep-outs
Keep-Out Layer:
  lines w0.254: 88.392,52.959 89.027,52.324 111.76,52.324 112.522,53.086 112.522,112.268 111.633,113.157 89.408,113.157 88.392,112.141 88.392,52.959

## Silkscreen, mask and mechanical layers (free items; w line width, h text height)
Mechanical 1:
  lines w0.254: 88.392,52.959 89.027,52.324 111.76,52.324 112.522,53.086 112.522,112.268 111.633,113.157 89.408,113.157 88.392,112.141 88.392,52.959

## Text inside footprints (layer, text, board x,y; h text height)
Download: Top Overlay "10" at 107.188,110.109 h1.12; Top Overlay "9" at 107.188,107.569 h1.12; Top Overlay "1" at 93.472,107.569 h1.12; Top Overlay "2" at 92.964,110.109 h1.12